# Altium PCB Group_2.PcbDoc (part 2 of 2)
Units mil, origin at the board's own origin, x right, y up, seen from the top; angles counter-clockwise.
Board outline 3460 x 5000 mil, 2 copper layers (Top Layer, Bottom Layer); 164 components, 77 nets, 434 pads, 114 vias.
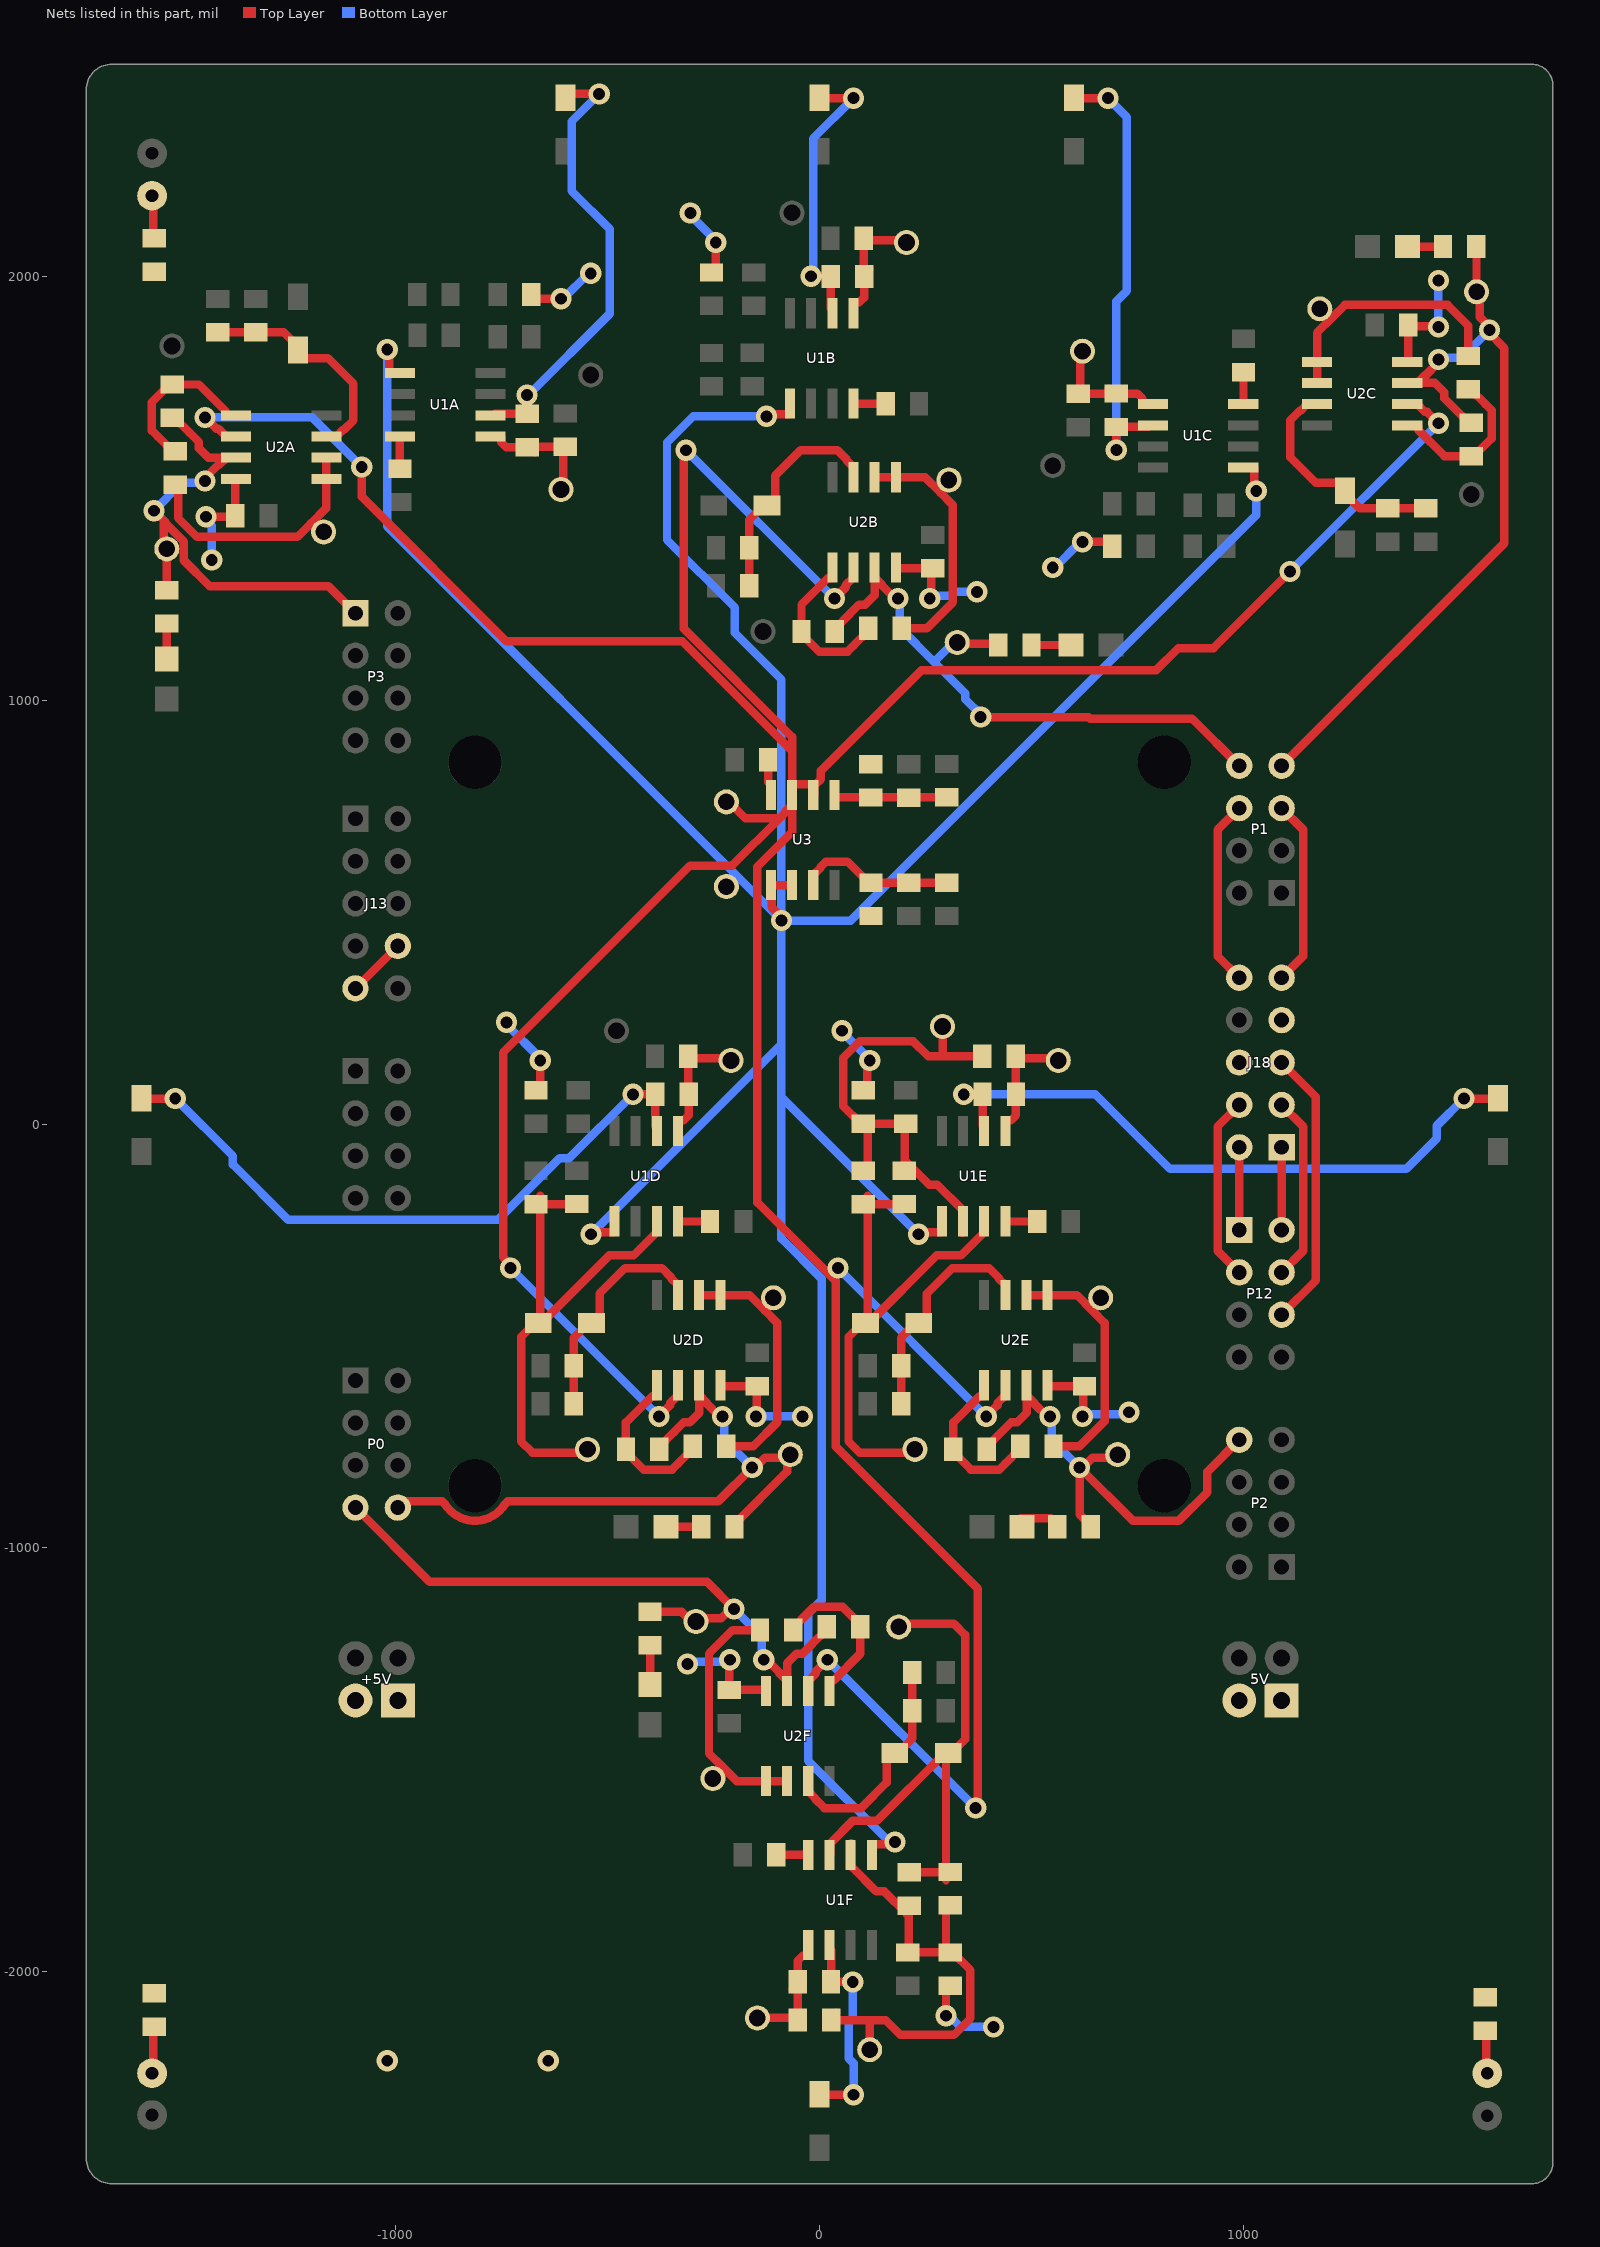
[diagram p2: the nets of this part, all layers, seen from the top]

## Via types
v1: diameter 50, hole 28, Top Layer to Bottom Layer, 114 vias

## Nets (pads, with @x,y where several pads share a name; then routed paths per layer and width w, separated by ;. In a path a pad name is that pad's centre, name@x,y a point inside that pad or via, vN(x,y) a via of type N, cw(c..) or ccw(c..) an arc to the next point about the centre after c; other vN are vias at no path point) (continued)
NetC1D_2: C1D.2 D1D.1 R5D.1 TP3D.1 U1D.7 | length 1245
  Top Layer w20: C1D.2@-659.05,-189.37 -658.73,-189.06 -573.07,-189.06 R5D.1@-572.76,-188.74 ; C1D.2@-659.05,-169.37 -659.05,-465.04 -666.92,-465.04 -704.05,-502.17 -704.05,-748.64 -677.69,-775 -554.83,-775 TP3D.1@-547.39,-767.56 ; D1D.1@-655.11,-468.98 -496.13,-310 -439.05,-310 -385.86,-256.81 -385.86,-231.25 U1D.7@-384.05,-229.44
NetC1E_1: C1E.1 C2E.2 R5E.2 R6E.1 R8E.2 TP2E.1 U1E.6 | length 1114.5
  Top Layer w20: R6E.1@103.17,0.63 97.27,0.63 55.61,42.28 55.61,156.08 94.53,195 220.84,195 255.84,160 293.17,160 ; C1E.1@113.17,-90.63 R6E.1@113.17,-5.91 ; R6E.1@113.49,0.31 R8E.2@202.86,0.31 ; R5E.2@201.32,-108.14 R5E.2@199.46,-110 R5E.2@205.37,-110 ; 201.32,-88.14 201.32,-1.23 R8E.2@202.86,0.31 ; R8E.2@203.17,0.63 R8E.2@202.86,0.31 ; R5E.2@205.37,-90 259.06,-143.69 277.95,-143.69 336.36,-202.1 336.36,-227.63 U1E.6@338.17,-229.44 336.36,-231.25 U1E.6@336.36,-256.78 ; TP2E.1@290,230 290,163.17 293.17,160 ; C2E.2@383.8,160 293.17,160
NetC1E_2: C1E.2 D1E.1 R5E.1 TP3E.1 U1E.7 | length 1245
  Top Layer w20: C1E.2@113.17,-189.37 113.49,-189.06 199.15,-189.06 R5E.1@199.46,-188.74 ; C1E.2@113.17,-169.37 113.17,-465.04 105.3,-465.04 68.17,-502.17 68.17,-748.64 94.53,-775 217.39,-775 TP3E.1@224.83,-767.56 ; D1E.1@117.11,-468.98 276.09,-310 333.17,-310 386.36,-256.81 386.36,-231.25 U1E.7@388.17,-229.44
NetC1F_1: C1F.1 C2F.2 R5F.2 R6F.1 R8F.2 TP2F.1 U1F.6 | length 1135.6
  Top Layer w20: C2F.2@39.23,-2096.3 27.57,-2107.95 C2F.2@27.57,-2113.86 118.2,-2113.86 ; U1F.6@75.01,-1697.08 75.01,-1722.61 U1F.6@73.2,-1724.42 75.01,-1726.23 75.01,-1751.76 133.43,-1810.17 152.32,-1810.17 R5F.2@206.01,-1863.86 ; TP2F.1@118.2,-2183.86 118.2,-2113.86 ; R5F.2@206.01,-1843.86 R5F.2@211.91,-1843.86 R5F.2@210.06,-1845.71 ; R8F.2@208.2,-1954.49 R8F.2@208.52,-1954.17 ; 210.06,-1865.71 210.06,-1952.63 R8F.2@208.52,-1954.17 ; R6F.1@297.89,-1954.17 R8F.2@208.52,-1954.17 ; R6F.1@298.2,-1947.95 C1F.1@298.2,-1863.23 ; R6F.1@308.2,-1954.49 314.11,-1954.49 355.76,-1996.14 355.76,-2109.94 316.84,-2148.86 190.53,-2148.86 155.53,-2113.86 118.2,-2113.86
NetC1F_2: C1F.2 D1F.1 R5F.1 TP3F.1 U1F.7 | length 1245
  Top Layer w20: U1F.7@23.2,-1724.42 25.01,-1722.61 25.01,-1697.05 78.2,-1643.86 135.29,-1643.86 D1F.1@294.27,-1484.88 ; TP3F.1@186.55,-1186.3 193.99,-1178.86 316.84,-1178.86 343.2,-1205.22 343.2,-1451.69 306.08,-1488.82 298.2,-1488.82 C1F.2@298.2,-1784.49 ; R5F.1@211.91,-1765.12 212.23,-1764.8 297.89,-1764.8 C1F.2@298.2,-1764.49
NetC2A_1: C2A.1 R4A.1 TP1A.1 U1A.1 | length 315.3
  Top Layer w20: U1A.1@-776.84,1621.83 -753.22,1621.83 -751.41,1620.02 -751.41,1608.54 -739.7,1596.83 R4A.1@-690,1596.83 -684.09,1596.83 R4A.1@-672.44,1585.17 ; R4A.1@-689.69,1597.14 C2A.1@-605.5,1597.14 ; TP1A.1@-610,1496.83 -605,1501.83 -605,1592.46 C2A.1@-600,1597.46
NetC2B_1: C2B.1 R4B.1 TP1B.1 U1B.1 | length 315.3
  Top Layer w20: U1B.1@80,1912.6 80,1936.22 81.81,1938.03 93.28,1938.03 105,1949.75 R4B.1@105,1999.44 105,2005.35 R4B.1@116.65,2017 ; C2B.1@104.37,2089.44 109.37,2084.44 200,2084.44 TP1B.1@205,2079.44 ; R4B.1@104.68,1999.76 C2B.1@104.68,2083.94
NetC2C_1: C2C.1 R4C.1 TP1C.1 U1C.1 | length 315.3
  Top Layer w20: C2C.1@610,1722.54 615,1727.54 615,1818.17 TP1C.1@620,1823.17 ; C2C.1@615.5,1722.86 R4C.1@699.68,1722.86 ; R4C.1@682.44,1734.83 694.09,1723.17 R4C.1@700,1723.17 749.7,1723.17 761.41,1711.46 761.41,1699.98 763.22,1698.17 U1C.1@786.84,1698.17
NetC2D_1: C2D.1 R4D.1 TP1D.1 U1D.1 | length 315.3
  Top Layer w20: U1D.1@-334.05,-16.84 -334.05,6.78 -332.24,8.59 -320.76,8.59 -309.05,20.3 R4D.1@-309.05,70 -309.05,75.91 R4D.1@-297.39,87.56 ; C2D.1@-309.68,160 -304.68,155 -214.05,155 TP1D.1@-209.05,150 ; R4D.1@-309.36,70.32 C2D.1@-309.36,154.5
NetC2E_1: C2E.1 R4E.1 TP1E.1 U1E.1 | length 315.3
  Top Layer w20: U1E.1@438.17,-16.84 438.17,6.78 439.98,8.59 451.46,8.59 463.17,20.3 R4E.1@463.17,70 463.17,75.91 R4E.1@474.83,87.56 ; C2E.1@462.54,160 467.54,155 558.17,155 TP1E.1@563.17,150 ; R4E.1@462.86,70.32 C2E.1@462.86,154.5
NetC2F_1: C2F.1 R4F.1 TP1F.1 U1F.1 | length 315.3
  Top Layer w20: TP1F.1@-151.8,-2103.86 TP1F.1@-146.8,-2108.86 -56.17,-2108.86 C2F.1@-51.17,-2113.86 ; R4F.1@-63.45,-2041.42 -51.8,-2029.76 R4F.1@-51.8,-2023.86 -51.8,-1974.16 -40.08,-1962.45 -28.61,-1962.45 -26.8,-1960.64 U1F.1@-26.8,-1937.01 ; C2F.1@-51.48,-2108.36 R4F.1@-51.48,-2024.17
NetC3A_2: C3A.2 D1A.2 R9A.2 U2A.3 | length 544.1
  Top Layer w20: C3A.2@-1420,1867.46 R9A.2@-1330,1867.46 -1263.78,1867.46 -1230,1833.68 D1A.2@-1230,1825.8 -1230,1820.45 -1216.38,1806.83 -1160,1806.83 -1100,1746.83 -1100,1660 -1122.22,1637.78 -1124.13,1637.78 -1140.08,1621.83 U2A.3@-1163.7,1621.83
NetC3B_2: C3B.2 D1B.2 R9B.2 U2B.3 | length 544.1
  Top Layer w20: C3B.2@-165.63,1269.44 R9B.2@-165.63,1359.44 -165.63,1425.66 -131.85,1459.44 D1B.2@-123.98,1459.44 -118.62,1459.44 -105,1473.07 -105,1529.44 -45,1589.44 41.83,1589.44 64.05,1567.22 64.05,1565.32 80,1549.36 U2B.3@80,1525.74
NetC3C_2: C3C.2 D1C.2 R9C.2 U2C.3 | length 544.1
  Top Layer w20: U2C.3@1173.7,1698.17 1150.08,1698.17 1134.13,1682.22 1132.22,1682.22 1110,1660 1110,1573.17 1170,1513.17 1226.38,1513.17 1240,1499.55 D1C.2@1240,1494.2 1240,1486.32 1273.78,1452.54 R9C.2@1340,1452.54 C3C.2@1430,1452.54
NetC3D_2: C3D.2 D1D.2 R9D.2 U2D.3 | length 544.1
  Top Layer w20: C3D.2@-579.68,-660 R9D.2@-579.68,-570 -579.68,-503.78 -545.9,-470 D1D.2@-538.02,-470 -532.67,-470 -519.05,-456.38 -519.05,-400 -459.05,-340 -372.22,-340 -350,-362.22 -350,-364.13 -334.05,-380.08 U2D.3@-334.05,-403.7
NetC3E_2: C3E.2 D1E.2 R9E.2 U2E.3 | length 544.1
  Top Layer w20: C3E.2@192.54,-660 R9E.2@192.54,-570 192.54,-503.78 226.32,-470 D1E.2@234.2,-470 239.55,-470 253.17,-456.38 253.17,-400 313.17,-340 400,-340 422.22,-362.22 422.22,-364.13 438.17,-380.08 U2E.3@438.17,-403.7
NetC3F_2: C3F.2 D1F.2 R9F.2 U2F.3 | length 544.1
  Top Layer w20: U2F.3@-26.8,-1550.16 -26.8,-1573.78 -10.84,-1589.73 -10.84,-1591.64 11.37,-1613.86 98.2,-1613.86 158.2,-1553.86 158.2,-1497.48 171.82,-1483.86 D1F.2@177.18,-1483.86 185.05,-1483.86 218.83,-1450.08 R9F.2@218.83,-1383.86 C3F.2@218.83,-1293.86
NetC7_2: C7.2 R11.2 R13.1 U3.5 | length 270.4
  Top Layer w20: U3.5@35,776.3 35,772.44 36.81,770.63 120,770.63 R11.2@120.31,770.31 209.69,770.31 R13.1@210,770 210.63,770.63 299.37,770.63 C7.2@300,771.26
NetC8_2: C8.2 R12.2 R14.1 U3.3 | length 373.5
  Top Layer w20: U3.3@-15,563.7 -15,587.32 3.19,605.51 3.19,607.42 14.9,619.13 65.59,619.13 115.35,569.37 R12.2@121.26,569.37 C8.2@210,569.37 R14.1@300,569.37
NetD1_A: D1.A R1.1 | length 102.4
  Top Layer w20: D1.A@-1574.8,2189.76 -1572.4,2187.36 -1572.4,2091.77 R1.1@-1570,2089.37
NetD2_A: D2.A R2.1 | length 112
  Top Layer w20: D2.A@-1574.8,-2239.37 -1572.4,-2236.97 -1572.4,-2131.77 R2.1@-1570,-2129.37
NetD2A_1: D2A.1 R11A.2 | length 83.4
  Top Layer w20: D2A.1@-1540,1097.24 R11A.2@-1540,1180.63
NetD2B_1: D2B.1 R11B.2 | length 92.8
  Top Layer w20: R11B.2@500,1130 D2B.1@592.76,1130
NetD2C_1: D2C.1 R11C.2 | length 83.4
  Top Layer w20: D2C.1@1387.24,2070 R11C.2@1470.63,2070
NetD2D_1: D2D.1 R11D.2 | length 83.4
  Top Layer w20: D2D.1@-362.76,-950 R11D.2@-279.37,-950
NetD2E_1: D2E.1 R11E.2 | length 94.3
  Top Layer w20: D2E.1@474.49,-930 545.2,-930 R11E.2@561.89,-946.69
NetD2F_1: D2F.1 R11F.2 | length 93.4
  Top Layer w20: D2F.1@-400,-1322.76 R11F.2@-400,-1229.37
NetD3_A: D3.A R3.1 | length 102.6
  Top Layer w20: R3.1@1570,-2138.74 1572.4,-2141.14 1572.4,-2236.97 D3.A@1574.8,-2239.37
NetPD1A_2: PD1A.2 R4A.2 U1A.2 | length 1074.8
  Top Layer w20: U1A.2@-776.84,1671.83 -766.94,1671.83 -765.13,1673.64 -765.13,1675.57 R4A.2@-690,1675.57 v1(-690,1720) ; PD1A.2@-600,2421.02 -591.02,2430 v1(-520,2430)
  Bottom Layer w20: v1(-690,1720) -686.36,1720 -495,1911.36 -495,2111.15 -585,2201.15 -585,2365 v1(-520,2430)
NetPD1B_2: PD1B.2 R4B.2 U1B.2 | length 687.9
  Top Layer w20: v1@-30,2000 -29.44,1999.44 R4B.2@26.26,1999.44 26.26,1924.31 28.19,1924.31 30,1922.5 U1B.2@30,1912.6 ; PD1B.2@0,2421.02 1.02,2420 v1(80,2420)
  Bottom Layer w20: v1(-20,2000) -15.47,2004.53 -15.47,2324.53 v1(80,2420)
NetPD1C_2: PD1C.2 R4C.2 U1C.2 | length 1083.4
  Top Layer w20: PD1C.2@600,2421.02 601.02,2420 v1(680,2420) ; v1(700,1590) R4C.2@700,1644.43 775.13,1644.43 775.13,1646.36 776.94,1648.17 U1C.2@786.84,1648.17
  Bottom Layer w20: v1(680,2420) 725,2375 725,1965.88 700,1940.88 v1(700,1590)
NetPD1D_2: PD1D.2 R4D.2 U1D.2 | length 1554.9
  Top Layer w20: PD1D.2@-1600,61.02 -1598.98,60 v1(-1520,60) ; v1(-440,70) R4D.2@-387.79,70 -387.79,-5.13 -385.86,-5.13 -384.05,-6.94 U1D.2@-384.05,-16.84
  Bottom Layer w20: v1(-1520,60) -1384.13,-75.87 -1384.13,-95.87 -1254,-226 -758.69,-226 -613.56,-80.87 -590.87,-80.87 v1(-440,70)
NetPD1E_2: PD1E.2 R4E.2 U1E.2 | length 1509.2
  Top Layer w20: R4E.2@384.43,70 384.43,-5.13 386.36,-5.13 388.17,-6.94 U1E.2@388.17,-16.84 ; v1(1520,60) 1598.98,60 PD1E.2@1600,61.02
  Bottom Layer w20: v1(340,70) 650.7,70 826.7,-106 1384,-106 1455.88,-34.12 1455.88,-4.12 v1(1520,60)
NetPD1F_2: PD1F.2 R4F.2 U1F.2 | length 491.8
  Top Layer w20: PD1F.2@0,-2288.98 1.02,-2290 v1(80,-2290) ; U1F.2@23.2,-1937.01 23.2,-1946.92 25.01,-1948.73 26.94,-1948.73 R4F.2@26.94,-2023.86 v1@68.2,-2023.86
  Bottom Layer w20: v1@74.14,-2290 v1(80,-2290) 80,-2215.7 68.67,-2204.37 68.67,-2117.94 78.2,-2108.41 v1(78.2,-2023.86)
NetR7A_1: R7A.1 R10A.2 U2A.5 | length 393.7
  Top Layer w20: R7A.1@-1520,1586.83 -1525.91,1586.83 -1560.8,1621.72 -1560.98,1621.72 -1575.12,1635.87 -1575.12,1702.89 -1533.46,1744.54 R10A.2@-1527.56,1744.54 -1464.08,1744.54 -1401.73,1682.2 -1401.73,1673.64 -1399.92,1671.83 U2A.5@-1376.3,1671.83
NetR7A_2: R7A.2 TP4A.1 U2A.1 U2A.2 | length 610.4
  Top Layer w20: R7A.2@-1520,1508.09 -1513.41,1501.5 -1513.41,1429.77 -1468.64,1385 -1231.83,1385 -1200,1416.83 ; TP4A.1@-1190,1406.83 -1200,1416.83 ; U2A.2@-1163.7,1571.83 U2A.1@-1163.7,1521.83 -1163.7,1453.13 -1200,1416.83
NetR7B_1: R7B.1 R10B.2 U2B.5 | length 393.7
  Top Layer w20: U2B.5@30,1313.14 30,1289.52 28.19,1287.71 19.63,1287.71 -42.72,1225.37 R10B.2@-42.72,1161.88 -42.72,1155.98 -1.06,1114.32 65.96,1114.32 80.1,1128.47 80.1,1128.64 115,1163.54 R7B.1@115,1169.44
NetR7B_2: R7B.2 TP4B.1 U2B.1 U2B.2 | length 600.9
  Top Layer w20: U2B.2@130,1525.74 U2B.1@180,1525.74 248.7,1525.74 285,1489.44 ; R7B.2@193.74,1169.44 253.08,1169.44 314.14,1230.5 314.14,1460.3 285,1489.44 ; TP4B.1@295,1499.44 285,1489.44
NetR7C_1: R7C.1 R10C.2 U2C.5 | length 393.7
  Top Layer w20: U2C.5@1386.3,1648.17 1409.92,1648.17 1411.73,1646.36 1411.73,1637.8 1474.08,1575.46 R10C.2@1537.56,1575.46 1543.46,1575.46 1585.12,1617.11 1585.12,1684.13 1570.98,1698.28 1570.8,1698.28 1535.91,1733.17 R7C.1@1530,1733.17
NetR7C_2: R7C.2 TP4C.1 U2C.1 U2C.2 | length 608.1
  Top Layer w20: U2C.2@1173.7,1748.17 U2C.1@1173.7,1798.17 1173.7,1866.87 1210,1903.17 ; TP4C.1@1200,1913.17 1210,1903.17 ; R7C.2@1530,1811.91 1530,1883.64 1481.32,1932.32 1239.14,1932.32 1210,1903.17
NetR7D_1: R7D.1 R10D.2 U2D.5 | length 393.7
  Top Layer w20: U2D.5@-384.05,-616.3 -384.05,-639.92 -385.86,-641.73 -394.42,-641.73 -456.76,-704.08 R10D.2@-456.76,-767.56 -456.76,-773.46 -415.11,-815.12 -348.09,-815.12 -333.94,-800.98 -333.94,-800.8 -299.05,-765.91 R7D.1@-299.05,-760
NetR7D_2: R7D.2 TP4D.1 U2D.1 U2D.2 | length 603.6
  Top Layer w20: U2D.2@-284.05,-403.7 U2D.1@-234.05,-403.7 -165.35,-403.7 -129.05,-440 ; R7D.2@-220.31,-760 -156.36,-760 -99.9,-703.54 -99.9,-469.14 -129.05,-440 ; TP4D.1@-119.05,-430 -129.05,-440
NetR7E_1: R7E.1 R10E.2 U2E.5 | length 393.7
  Top Layer w20: U2E.5@388.17,-616.3 388.17,-639.92 386.36,-641.73 377.8,-641.73 315.46,-704.08 R10E.2@315.46,-767.56 315.46,-773.46 357.11,-815.12 424.13,-815.12 438.28,-800.98 438.28,-800.8 473.17,-765.91 R7E.1@473.17,-760
NetR7E_2: R7E.2 TP4E.1 U2E.1 U2E.2 | length 602.3
  Top Layer w20: U2E.2@488.17,-403.7 U2E.1@538.17,-403.7 606.87,-403.7 643.17,-440 ; R7E.2@551.91,-760 613.64,-760 672.32,-701.32 672.32,-469.14 643.17,-440 ; TP4E.1@653.17,-430 643.17,-440
NetR7F_1: R7F.1 R10F.2 U2F.5 | length 393.7
  Top Layer w20: R7F.1@-61.8,-1193.86 -61.8,-1187.95 -26.9,-1153.06 -26.9,-1152.88 -12.76,-1138.74 54.26,-1138.74 95.92,-1180.39 R10F.2@95.92,-1186.3 95.92,-1249.78 33.57,-1312.13 25.01,-1312.13 23.2,-1313.94 U2F.5@23.2,-1337.56
NetR7F_2: R7F.2 TP4F.1 U2F.1 U2F.2 | length 604.1
  Top Layer w20: TP4F.1@-241.8,-1523.86 -231.8,-1513.86 ; R7F.2@-140.54,-1193.86 -205.44,-1193.86 -260.94,-1249.36 -260.94,-1484.72 -231.8,-1513.86 ; U2F.2@-76.8,-1550.16 U2F.1@-126.8,-1550.16 -195.5,-1550.16 -231.8,-1513.86
RD1: J18.1 P12.2 | length 195
  Top Layer w20: P12.2@1090,-250 J18.1@1090,-55
RENCDA: J18.9 P1.5 | length 442.2
  Top Layer w20: J18.9@1090,345 1141,396 1141,694 P1.5@1090,745
RENCDB: J18.10 P1.6 | length 442.2
  Top Layer w20: J18.10@990,345 939,396 939,694 P1.6@990,745
RIN1: J18.3 P12.4 | length 437.2
  Top Layer w20: P12.4@1090,-350 1141,-299 1141,-6 J18.3@1090,45
RIN2: J18.2 P12.1 | length 195
  Top Layer w20: P12.1@990,-250 J18.2@990,-55
RINV: J18.5 P12.6 | length 662.1
  Top Layer w20: P12.6@1090,-450 1171,-369 1171,64 J18.5@1090,145
RSLEW: J18.4 P12.3 | length 437.2
  Top Layer w20: P12.3@990,-350 939,-299 939,-6 J18.4@990,45
VCC: 5V.1 5V.2 +5V.1 +5V.2 C4A.1 C4B.1 C4C.1 C4D.1 C4E.1 C4F.1 C5A.1 C5B.1 C5C.1 C5D.1 C5E.1 C5F.1 C6.1 J13.8 J13.9 J18.6 J18.7 R1.2 R2.2 R3.2 R6A.2 R6B.2 R6C.2 R6D.2 R6E.2 R6F.2 R11.1 R12.1 U1A.8 U1B.8 U1C.8 U1D.8 U1E.8 U1F.8 U2A.8 U2B.8 U2C.8 U2D.8 U2E.8 U2F.8 U3.8 | length 3364
  Top Layer w20: v1(-1447.38,1432.62) -1381.36,1432.62 C4A.1@-1378.74,1435.24 -1378.74,1520.02 -1376.93,1521.83 U2A.8@-1376.3,1521.83 ; J13.9@-1095,320 J13.8@-995,420 ; C5A.1@-990,1546.2 -990,1621.27 U1A.8@-989.44,1621.83 ; R6A.2@-681.26,1946.83 v1(-610,1946.83) ; R6D.2@-659.05,78.74 v1(-659.05,150) ; U1D.8@-334.05,-229.44 -333.49,-230 C5D.1@-258.42,-230 ; R6B.2@-245,2008.18 v1(-245,2079.44) ; U2D.8@-234.05,-616.3 -234.05,-616.93 -232.24,-618.74 C4D.1@-147.46,-618.74 -148.73,-620.01 -148.73,-688.73 v1(-150,-690) ; v1(-211.8,-1263.86) -212.59,-1264.65 -212.59,-1334.33 C4F.1@-213.38,-1335.12 -128.61,-1335.12 -126.8,-1336.93 U2F.8@-126.8,-1337.56 ; C6.1@-121.65,859.02 -121.65,806.57 -115,799.92 U3.8@-115,776.3 ; C5F.1@-102.43,-1723.86 -27.36,-1723.86 U1F.8@-26.8,-1724.42 ; U1B.8@80,1700 80.56,1699.44 C5B.1@155.63,1699.44 ; R6E.2@113.17,78.74 112.43,79.48 112.43,144.26 v1(118.17,150) ; U2B.8@180,1313.14 180,1312.51 181.81,1310.7 C4B.1@266.58,1310.7 263.29,1307.41 263.29,1243.29 v1(260,1240) ; v1(298.2,-2103.86) R6F.2@298.2,-2032.6 ; U1E.8@438.17,-229.44 438.73,-230 C5E.1@513.8,-230 ; U2E.8@538.17,-616.3 538.17,-616.93 539.98,-618.74 C4E.1@624.76,-618.74 622.38,-621.12 622.38,-687.62 v1(620,-690) ; v1(620,1373.17) R6C.2@691.26,1373.17 ; U1C.8@999.44,1698.17 1000,1698.73 C5C.1@1000,1773.8 ; U2C.8@1386.3,1798.17 1386.93,1798.17 1388.74,1799.98 C4C.1@1388.74,1884.76 1391.12,1882.38 1457.62,1882.38 v1(1460,1880)
  Bottom Layer w20: v1(-1447.38,1432.62) -1447.38,1424.5 -1434,1411.12 v1(-1434,1330.83) ; v1(-738.9,239.85) -738.9,234.85 -659.05,155 v1(-659.05,150) ; v1(-610,1946.83) -605,1946.83 -545,2006.83 v1(-540,2006.83) ; v1(-311.8,-1273.86) -306.8,-1268.86 -216.8,-1268.86 v1(-211.8,-1263.86) ; v1(-305,2149.44) -305,2144.44 -245,2084.44 v1(-245,2079.44) ; v1(-150,-690) v1(-40,-690) ; v1(53.17,220) 53.17,217.5 118.17,152.5 v1(118.17,150) ; v1(260,1240) 265.74,1245.74 306.3,1245.74 316,1255.44 v1(371,1255.44) ; v1(298.2,-2103.86) 306.32,-2103.86 332.46,-2130 v1(410,-2130) ; v1(550,1313.17) 555,1313.17 615,1373.17 v1(620,1373.17) ; v1(620,-690) 625,-685 725,-685 v1(730,-680) ; v1(1460,1880) v1(1460,1990)
  other v1: -1020,-2210 -640,-2210
Vcompare: TP5.1 U2A.6 U2B.6 U2C.6 U2D.6 U2E.6 U2F.6 U3.6 U3.7 | length 11370.5
  Top Layer w20: v1(-1450,1666.83) -1423.19,1640.02 -1418.11,1640.02 -1399.92,1621.83 U2A.6@-1376.3,1621.83 ; v1(-1080,1550) -1080,1479.96 -738.42,1138.38 -323.51,1138.38 -65,879.86 ; v1(-729.05,-340) -729.05,-331.88 -746.61,-314.32 -746.61,168.51 -305.59,609.53 -206.24,609.53 -94.9,720.87 ; v1(-379.05,-690) -352.24,-663.19 -352.24,-658.11 -334.05,-639.92 U2D.6@-334.05,-616.3 ; v1(-315,1589.44) -320,1584.44 -320,1168.38 -65,913.38 -65,879.86 ; TP5.1@-220,760 -214.08,760 -174.95,720.87 -94.9,720.87 ; U2F.6@-26.8,-1337.56 -26.8,-1313.94 -8.61,-1295.75 -8.61,-1290.67 v1(18.2,-1263.86) ; U3.6@-15.1,801.73 -63.19,801.73 U3.7@-65,799.92 ; v1(35,1239.44) 61.81,1266.25 61.81,1271.33 80,1289.52 U2B.6@80,1313.14 ; v1(368.2,-1613.86) 373.2,-1608.86 373.2,-1096.1 38.17,-761.07 38.17,-370.35 -146.81,-185.37 -146.81,607.42 -65,689.23 U3.7@-65,752.68 ; v1(393.17,-690) 419.98,-663.19 419.98,-658.11 438.17,-639.92 U2E.6@438.17,-616.3 ; v1(1110,1303.17) 929.57,1122.74 846.38,1122.74 793.93,1070.29 240.29,1070.29 3.19,833.19 3.19,813.45 -8.53,801.73 U3.6@-13.19,801.73 ; U2C.6@1386.3,1698.17 1409.92,1698.17 1428.11,1679.98 1433.19,1679.98 v1(1460,1653.17) ; -94.9,720.87 -80.95,734.82 -80.95,736.72 U3.7@-65,752.68 ; U3.7@-65,752.68 U3.7@-65,776.3 U3.7@-65,799.92 ; U3.7@-65,799.92 -65,879.86 ; U3.6@-13.19,801.73 -15,799.92 U3.6@-15,776.3 -13.19,778.11 U3.6@-13.19,801.73
  Bottom Layer w20: v1(-1450,1666.83) -1196.83,1666.83 v1(-1080,1550) ; v1(-729.05,-340) v1(-379.05,-690) ; v1(-315,1589.44) v1(35,1239.44) ; v1(18.2,-1263.86) v1(368.2,-1613.86) ; v1(43.17,-340) v1(393.17,-690) ; v1(1110,1303.17) v1(1460,1653.17)
Voffset: TP6.1 U1A.5 U1B.5 U1C.5 U1D.5 U1E.5 U1F.5 U3.1 U3.2 | length 8888
  Top Layer w20: v1(-1020,1826.83) -1014.88,1821.7 -1014.88,1773.64 -1013.07,1771.83 U1A.5@-989.44,1771.83 ; v1(-539.05,-260) -533.92,-254.88 -485.86,-254.88 -484.05,-253.07 U1D.5@-484.05,-229.44 ; v1(-125,1669.44) -119.88,1674.57 -71.81,1674.57 -70,1676.38 U1B.5@-70,1700 ; v1(-90,480) -90,488.12 -113.19,511.31 -113.19,561.89 U3.1@-115,563.7 U3.2@-65,563.7 ; U1F.5@123.2,-1724.42 123.2,-1700.79 125.01,-1698.98 173.08,-1698.98 v1(178.2,-1693.86) ; v1(233.17,-260) 238.3,-254.88 286.36,-254.88 288.17,-253.07 U1E.5@288.17,-229.44 ; U1C.5@999.44,1548.17 1023.07,1548.17 1024.88,1546.36 1024.88,1498.3 v1(1030,1493.17)
  Bottom Layer w20: v1(-1020,1826.83) -1020,1410 -200,590 ; v1(-539.05,-260) -90,189.05 ; TP6.1@-220,560 -220,570 -200,590 ; v1(-125,1669.44) -298.64,1669.44 -360,1608.08 -360,1378.08 -200,1218.08 -200,1158.49 -90,1048.49 v1(-90,480) ; v1(178.2,-1693.86) 172.46,-1688.12 158.82,-1688.12 -26.8,-1502.5 -26.8,-1155.15 5,-1123.35 5,-365.47 -90,-270.47 -90,63.17 ; v1(233.17,-260) -90,63.17 ; v1(1030,1493.17) 1030,1436.36 73.64,480 v1(-90,480) ; -200,590 v1(-90,480) ; -90,63.17 -90,189.05 ; -90,189.05 v1(-90,480)
Vout1: P3.1 R10A.1 R11A.1 U2A.7 VpdoA.1 | length 1187.3
  Top Layer w20: v1(-1570,1446.83) -1543.41,1420.24 -1543.41,1417.35 -1500.08,1374.02 -1500.08,1330.08 -1439.09,1269.09 -1159.09,1269.09 P3.1@-1095,1205 ; -1547.47,1416.18 -1547.47,1364.3 VpdoA.1@-1540,1356.83 R11A.1@-1540,1259.37 ; R10A.1@-1527.56,1665.8 -1521.65,1665.8 -1486.76,1630.91 -1486.58,1630.91 -1464.16,1608.48 -1464.16,1594.25 -1441.73,1571.83 U2A.7@-1399.92,1571.83 ; v1(-1450,1516.83) -1450,1523.65 -1420.02,1553.64 -1418.11,1553.64 U2A.7@-1399.92,1571.83 ; U2A.7@-1376.3,1571.83 U2A.7@-1399.92,1571.83
  Bottom Layer w20: v1(-1570,1446.83) -1505,1511.83 -1505,1512.46 -1454.37,1512.46 v1(-1450,1516.83)
Vout2: P1.8 R10B.1 R11B.1 U2B.7 VpdoB.1 | length 1466.1
  Top Layer w20: R10B.1@36.02,1161.88 36.02,1167.79 70.92,1202.69 70.92,1202.86 93.35,1225.29 107.57,1225.29 130,1247.71 U2B.7@130,1289.52 ; U2B.7@130,1313.14 U2B.7@130,1289.52 ; v1(185,1239.44) 178.17,1239.44 148.19,1269.43 148.19,1271.33 U2B.7@130,1289.52 ; VpdoB.1@324.61,1136.11 327.66,1133.05 418.21,1133.05 R11B.1@421.26,1130 ; v1(380,960) 634.43,960 637.89,956.54 878.46,956.54 P1.8@990,845
  Bottom Layer w20: v1(185,1239.44) 189.37,1235.07 189.37,1170.63 270,1090 ; VpdoB.1@324.61,1136.11 316.11,1136.11 270,1090 ; v1(380,960) 380,965.86 344.04,1001.82 344.04,1015.96 270,1090
Vout3: P1.7 R10C.1 R11C.1 U2C.7 VpdoC.1 | length 1894.5
  Top Layer w20: P1.7@1090,845 1615.12,1370.12 1615.12,1830.51 1580,1865.63 v1(1580,1873.17) 1580,1881.29 1557.47,1903.82 1557.47,1955.7 VpdoC.1@1550,1963.17 1549.68,1963.49 1549.68,2069.69 R11C.1@1549.37,2070 ; U2C.7@1386.3,1748.17 U2C.7@1409.92,1748.17 ; v1(1460,1803.17) 1460,1796.35 1430.02,1766.36 1428.11,1766.36 U2C.7@1409.92,1748.17 ; R10C.1@1537.56,1654.2 1531.65,1654.2 1496.76,1689.09 1496.58,1689.09 1474.16,1711.52 1474.16,1725.75 1451.73,1748.17 U2C.7@1409.92,1748.17
  Bottom Layer w20: v1(1460,1803.17) 1464.37,1807.54 1515,1807.54 1515,1808.17 v1(1580,1873.17)
Vout4: P0.8 R10D.1 R11D.1 U2D.7 VpdoD.1 | length 1650.5
  Top Layer w20: P0.8@-995,-905 -980,-890 -890.5,-890 -884.64,-895.86 -883.15,-897.35 ccw(c-813,-853) -742.85,-897.35 -741.36,-895.86 -735.5,-890 -239.05,-890 v1(-159.05,-810) -150.93,-810 -128.4,-787.47 VpdoD.1@-76.52,-787.47 ; R10D.1@-378.02,-767.56 -378.02,-761.65 -343.13,-726.76 -343.13,-726.58 -320.7,-704.16 -306.47,-704.16 -284.05,-681.73 U2D.7@-284.05,-639.92 ; U2D.7@-284.05,-616.3 U2D.7@-284.05,-639.92 ; v1(-229.05,-690) -235.87,-690 -265.86,-660.02 -265.86,-658.11 U2D.7@-284.05,-639.92 ; R11D.1@-199.84,-949.21 R11D.1@-200.63,-950 -200.63,-944.09 -76.52,-819.98 VpdoD.1@-76.52,-787.47 ; VpdoD.1@-69.05,-780 VpdoD.1@-76.52,-787.47
  Bottom Layer w20: v1(-229.05,-690) -224.68,-694.37 -224.68,-745 -224.05,-745 v1(-159.05,-810)
Vout5: P2.8 R10E.1 R11E.1 U2E.7 VpdoE.1 | length 1216.1
  Top Layer w20: R10E.1@394.2,-767.56 394.2,-761.65 429.09,-726.76 429.09,-726.58 451.52,-704.16 465.75,-704.16 488.17,-681.73 U2E.7@488.17,-639.92 ; U2E.7@488.17,-616.3 U2E.7@488.17,-639.92 ; v1(543.17,-690) 536.35,-690 506.36,-660.02 506.36,-658.11 U2E.7@488.17,-639.92 ; R11E.1@639.37,-950 639.37,-944.09 627.72,-932.44 624.89,-932.44 613.17,-920.73 v1(613.17,-810) ; VpdoE.1@703.17,-780 695.7,-787.47 643.82,-787.47 621.29,-810 v1(613.17,-810) ; P2.8@990,-745 914.67,-820.33 914.67,-868.7 847.38,-935.99 739.16,-935.99 v1(613.17,-810)
  Bottom Layer w20: v1(543.17,-690) 547.54,-694.37 547.54,-745 548.17,-745 v1(613.17,-810)
Vout6: P0.7 R10F.1 R11F.1 U2F.7 VpdoF.1 | length 1637.1
  Top Layer w20: P0.7@-1095,-905 -920,-1080 -265.66,-1080 v1(-201.8,-1143.86) -209.92,-1143.86 -232.44,-1166.39 -284.33,-1166.39 VpdoF.1@-291.8,-1173.86 -302.37,-1173.86 -325.6,-1150.63 R11F.1@-400,-1150.63 ; v1(-131.8,-1263.86) -124.97,-1263.86 -94.99,-1293.84 -94.99,-1295.75 U2F.7@-76.8,-1313.94 ; U2F.7@-76.8,-1337.56 U2F.7@-76.8,-1313.94 ; R10F.1@17.18,-1186.3 17.18,-1192.21 -17.72,-1227.1 -17.72,-1227.28 -40.14,-1249.7 -54.37,-1249.7 -76.8,-1272.13 U2F.7@-76.8,-1313.94
  Bottom Layer w20: v1(-201.8,-1143.86) -136.8,-1208.86 -136.17,-1208.86 -136.17,-1259.49 v1(-131.8,-1263.86)
pads on no net: J13.1 J13.2 J13.10 J18.8 P0.1 P0.2 P0.3 P0.4 P0.5 P0.6 P1.1 P1.2 P1.3 P1.4 P2.1 P2.2 P2.3 P2.4 P2.5 P2.6 P2.7 P3.2 P3.3 P3.4 P12.5 P12.7 P12.8 P15.2 P15.5 P15.6

## Polygon pours and split planes (outlines as drawn)
GND on Bottom Layer "GND_L02_P000" (solid, pour order 0): -1700,-2460 -1690,-2470 1690,-2470 1690,2460 1680,2470 -1700,2470
VCC on Top Layer "VCC_L01_P001" (solid, pour order 1): 1700,-2490 1690,-2480 -1710,-2480 -1710,2470 -1700,2480 1700,2480

## Keep-outs
Keep-Out Layer:
  the board outline again, w10

## Silkscreen, mask and mechanical layers (free items; w line width, h text height)
Top Overlay:
  drawing of 11 lines, arcs and shapes, not listed
  text "Front" at -1580,3560 h100
  text "Put your design here" at -1580,3360 h100
  text "Don't delete any LED & hole" at -1590,3140 h100
  text "3.1" at -915,1190 h40
  text "3.0" at -1275,1180 h40
  text "3.2" at -1270,1090 h40
  text "3.3" at -920,1090 h40
  text "3.5" at -920,990 h40
  text "3.4" at -1270,980 h40
  text "1.7" at 855,915 h40
  text "3.7" at -930,895 h40
  text "3.6" at -1280,860 h40
  text "1.6" at 1170,840 h40
  text "1.5" at 810,730 h40
  text "1.4" at 1165,730 h40
  text "Ibat" at -1290,710 h40
  text "Vbat" at -910,700 h40
  text "1.3" at 815,630 h40
  text "1.2" at 1170,625 h40
  text "D1" at -1220,605 h40
  text "IN2" at -915,600 h40
  text "1.1" at 825,525 h40
  text "1.0" at 1170,525 h40
  text "IN1" at -1260,510 h40
  text "SLW" at -915,505 h40
  text "INV" at -1275,405 h40
  text "EN" at -915,400 h40
  text "ENCD" at 1170,330 h40
  text "ENCD" at 765,325 h40
  text "D2" at -1240,300 h40
  text "D2" at 1165,215 h40
  text "EN" at 835,130 h40
  text "INV" at 1165,125 h40
  text "15.1" at -920,115 h40
  text "15.0" at -1305,100 h40
  text "SLW" at 805,30 h40
  text "IN1" at 1170,25 h40
  text "15.2" at -1305,15 h40
  text "15.3" at -920,10 h40
  text "IN2" at 815,-75 h40
  text "D1" at 1170,-80 h40
  text "15.4" at -1305,-90 h40
  text "15.5" at -920,-90 h40
  text "ENCD" at -1315,-190 h40
  text "ENCD" at -920,-195 h40
  text "12.0" at 780,-265 h40
  text "12.1" at 1160,-270 h40
  text "12.2" at 780,-360 h40
  text "12.3" at 1165,-380 h40
  text "12.4" at 785,-465 h40
  text "12.5" at 1170,-465 h40
  text "12.6" at 775,-565 h40
  text "12.7" at 1175,-565 h40
  text "0.1" at -910,-610 h40
  text "0.0" at -1275,-620 h40
  text "0.2" at -1280,-720 h40
  text "0.3" at -915,-720 h40
  text "2.7" at 795,-720 h40
  text "2.6" at 1170,-755 h40
  text "2.5" at 805,-790 h40
  text "0.5" at -925,-795 h40
  text "0.4" at -1280,-820 h40
  text "2.4" at 1170,-860 h40
  text "0.6" at -1270,-895 h40
  text "0.7" at -925,-960 h40
  text "2.3" at 795,-970 h40
  text "2.2" at 1170,-970 h40
  text "2.1" at 815,-1060 h40
  text "2.0" at 1165,-1070 h40
  text "-" at -1195,-1230 h40 r180
  text "-" at -850,-1230 h40 r180
  text "-" at 900,-1230 h40 r180
  text "-" at 1215,-1230 h40 r180
  text "+" at -1185,-1380 h40 r90
  text "+" at 910,-1380 h40 r90
  text "+" at -850,-1390 h40 r90
  text "+" at 1225,-1390 h40 r90
  text "They didn't believe in us" at -1620,-1900 h60
  text "Team 2" at -1020,-2040 h60
Bottom Overlay:
  text "But god did!" at -950,-1810 h60
  text "Team 2" at 1040,-2130 h60
  text "Dylan, Franklin, Bailey and Marianne" at 1040,-2230.01 h60